# Altium PCB PCB1.PcbDoc
Units mil, origin at the board's own origin, x right, y up, seen from the top; angles counter-clockwise.
Board outline 6000 x 4000 mil, 2 copper layers (Top Layer, Bottom Layer); 2 components, 0 nets, 48 pads, 0 vias.
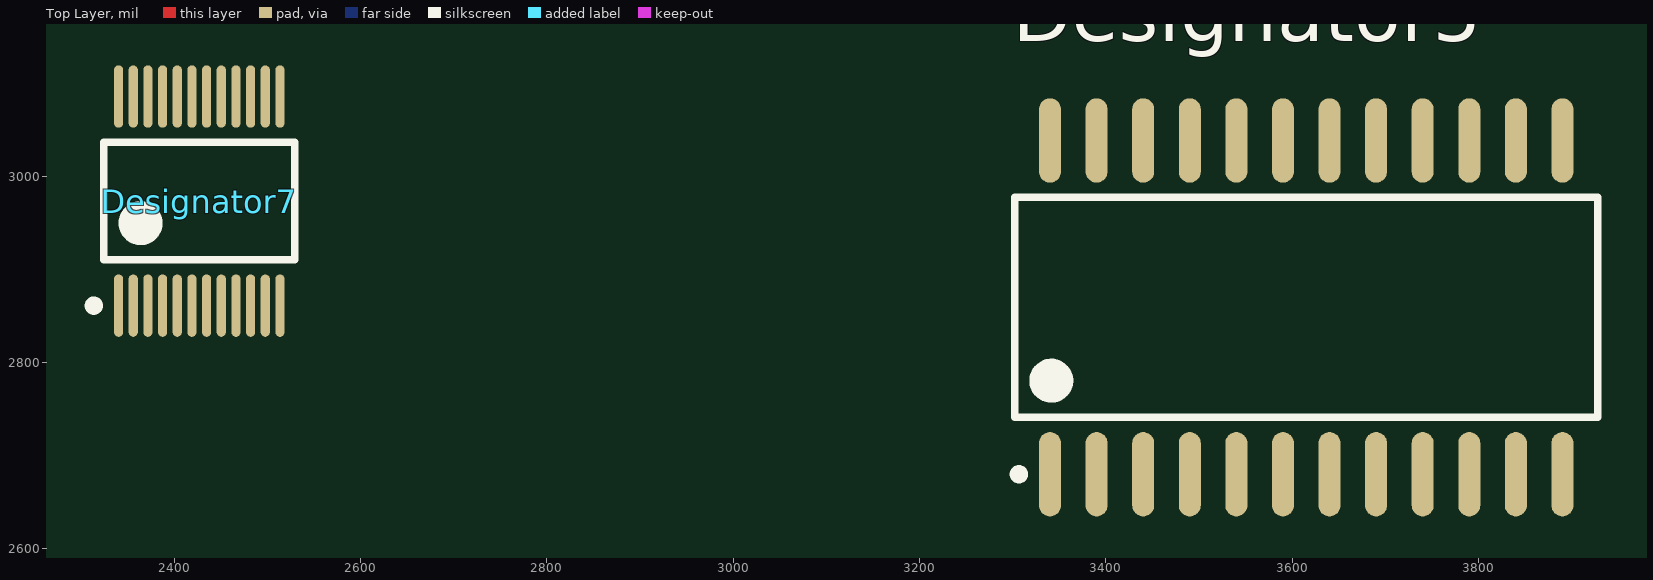
[diagram p0: Top Layer view]
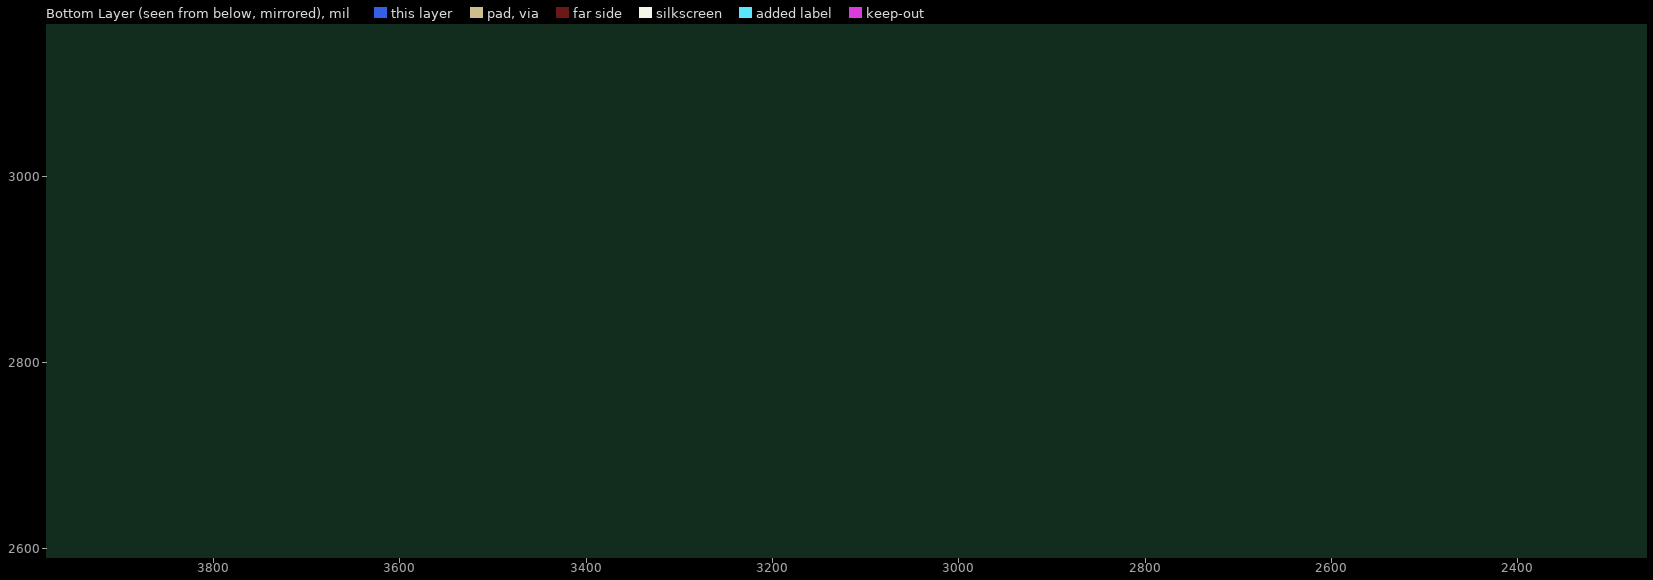
[diagram p1: Bottom Layer view, seen from below]

## Layer stack, top to bottom
Top Layer: signal copper 1.4
Dielectric: dielectric 12.6, FR-4, Dk 4.8
Bottom Layer: signal copper 1.4

## Board outline
1000,1000 7000,1000 7000,5000 1000,5000

## Design rules (kind name [scope] priority, off if disabled: settings)
Clearance [All] p1: gap=10
PolygonConnect [All] p1: connectstyle=Relief reliefconductorwidth=10 reliefentries=4 polygonreliefangle="90 Angle"
RoutingVias [All] p1: holewidth=28 width=50 viastyle="Through Hole" minholewidth=28 minwidth=50 maxholewidth=28 maxwidth=50
SilkscreenOverComponentPads [All] p1: minsilkscreentomaskgap=10
SolderMaskExpansion [All] p1: expansion=4
TestPointUsage [All] p1: valid=0 allowmultiple=FALSE
Testpoint [All] p1: side=15 testpointundercomponent=TRUE minsize=40 maxsize=100 preferedsize=60 minholesize=0 maxholesize=40 preferedholesize=32 testpointgrid=1 style=1023 order=0123456789
Width [All] p1: maxlimit=10 minlimit=10 preferedwidth=10
23 further rules are at their usual default settings.

## Components (designator, comment, footprint, x,y, rotation, side; value= is the part's Value field where it differs from the comment)
Designator5 "Comment" SN74LVC8T245_SMD_TOP_SOIC 3340,2680 r90 top
Designator7 "Comment" SN74LVC8T245_SMD_TOP_TSSOP 2340,2860 r90 top

## Footprints (in the part's own frame and the unit in brackets; to place one, negate y for a bottom-side part, rotate by r counter-clockwise, add the part's x,y. Pads: shape width x height; smd on the part's side, far side on the other; paste and mask are expansions set on the pad)
SN74LVC8T245_SMD_TOP_SOIC [mm]
  oval 2.3x0.6 smd: 1(0,0) 2(0,-1.27) 3(0,-2.54) 4(0,-3.81) 5(0,-5.08) 6(0,-6.35) 7(0,-7.62) 8(0,-8.89) 9(0,-10.16) 10(0,-11.43) 11(0,-12.7) 12(0,-13.97) 13(9.1,-13.97) 14(9.1,-12.7) 15(9.1,-11.43) 16(9.1,-10.16) 17(9.1,-8.89) 18(9.1,-7.62) 19(9.1,-6.35) 20(9.1,-5.08) 21(9.1,-3.81) 22(9.1,-2.54) 23(9.1,-1.27) 24(9.1,0)
  silkscreen extent -0.12,-14.93 7.55,0.97, body extent 0.75,-14.78 8.35,0.81, height 2.65
SN74LVC8T245_SMD_TOP_TSSOP [mm]
  oval 1.7x0.25 smd: 1(0.025,-0.005) 2(0.025,-0.405) 3(0.025,-0.805) 4(0.025,-1.205) 5(0.025,-1.605) 6(0.025,-2.005) 7(0.025,-2.405) 8(0.025,-2.805) 9(0.025,-3.205) 10(0.025,-3.605) 11(0.025,-4.005) 12(0.025,-4.405) 13(5.725,-4.405) 14(5.725,-4.005) 15(5.725,-3.605) 16(5.725,-3.205) 17(5.725,-2.805) 18(5.725,-2.405) 19(5.725,-2.005) 20(5.725,-1.605) 21(5.725,-1.205) 22(5.725,-0.805) 23(5.725,-0.405) 24(5.725,-0.005)
  silkscreen extent -0.1,-4.8 4.48,0.79, body extent 0.63,-4.8 5.13,0.4, height 1.2

## Nets (pads, with @x,y where several pads share a name; then routed paths per layer and width w, separated by ;. In a path a pad name is that pad's centre, name@x,y a point inside that pad or via, vN(x,y) a via of type N, cw(c..) or ccw(c..) an arc to the next point about the centre after c; other vN are vias at no path point)
pads on no net: Designator5.1 Designator5.2 Designator5.3 Designator5.4 Designator5.5 Designator5.6 Designator5.7 Designator5.8 Designator5.9 Designator5.10 Designator5.11 Designator5.12 Designator5.13 Designator5.14 Designator5.15 Designator5.16 Designator5.17 Designator5.18 Designator5.19 Designator5.20 Designator5.21 Designator5.22 Designator5.23 Designator5.24 Designator7.1 Designator7.2 Designator7.3 Designator7.4 Designator7.5 Designator7.6 Designator7.7 Designator7.8 Designator7.9 Designator7.10 Designator7.11 Designator7.12 Designator7.13 Designator7.14 Designator7.15 Designator7.16 Designator7.17 Designator7.18 Designator7.19 Designator7.20 Designator7.21 Designator7.22 Designator7.23 Designator7.24